# Altium PCB power_button_module.PcbDoc
Units mm, origin at the board's own origin, x right, y up, seen from the top; angles counter-clockwise.
Board outline 11.43 x 14.4 mm, 2 copper layers (Top Layer, Bottom Layer); 13 components, 9 nets, 42 pads, 0 vias.
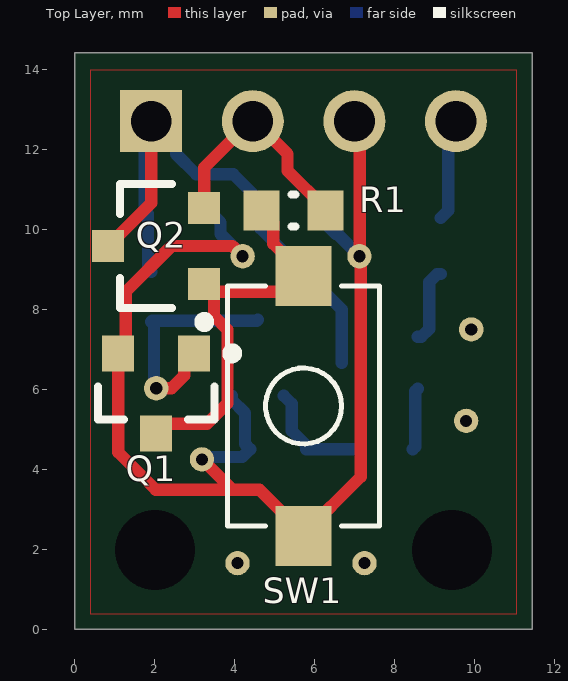
[diagram p0: Top Layer view]
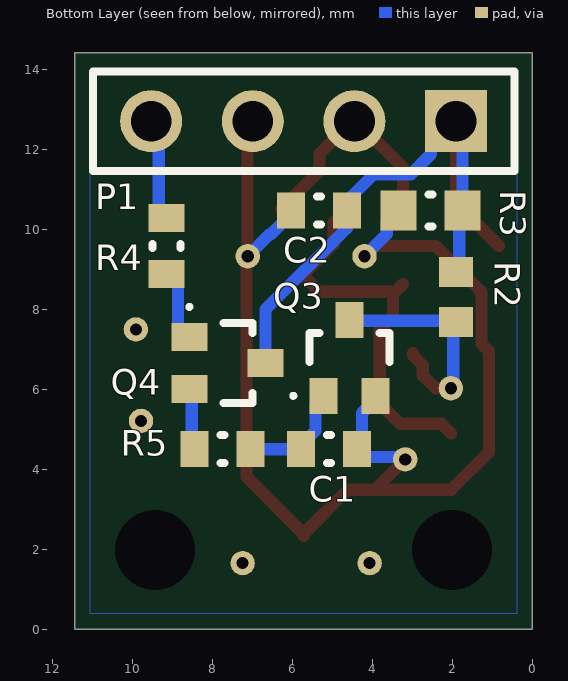
[diagram p1: Bottom Layer view, seen from below]

## Layer stack, top to bottom
Top Solder: solder mask 0.0102, Solder Resist, Dk 3.5
Top Layer: signal copper 0.0356
Dielectric 1: dielectric 0.32, FR-4, Dk 4.8
Bottom Layer: signal copper 0.0356
Bottom Solder: solder mask 0.0102, Solder Resist, Dk 3.5

## Board outline
0,0 11.43,0 11.43,14.405 0,14.405

## Design rules (kind name [scope] priority, off if disabled: settings)
Clearance [All] p1: gap=0.254 ignorepadtopadclearanceinfootprint=FALSE except(0: Arc-Hole Track-Hole SMDPad-Hole THPad-Hole Via-Hole Fill-Hole Poly-Hole Region-Hole Text-Hole)
PolygonConnect [All] p1: connectstyle=Relief reliefconductorwidth=0.254 reliefentries=4 polygonreliefangle="90 Angle" airgapwidth=0.254
RoomDefinition Latch [InComponentClass('Latch')] p1: confinementstyle=ConfineOut formatcopy=TRUE lockcomponents=FALSE outline 16.064,-12.011 68.007,-12.011 68.007,1.959 16.064,1.959
RoutingVias [All] p1: holewidth=0.711 width=1.27 viastyle="Through Hole" minholewidth=0.711 minwidth=1.27 maxholewidth=0.711 maxwidth=1.27
SolderMaskExpansion [All] p1: expansion=0.102
Width [All] p1: maxlimit=0.305 minlimit=0.254 preferedwidth=0.254 minimp=50.000000 maximp=50.000000 favimp=50.000000
30 further rules are at their usual default settings.

## Components (designator, comment, footprint, x,y, rotation, side; value= is the part's Value field where it differs from the comment)
C1 "CAP 100nF 6.3V 0603(1608)" CAPC0603(1608)100_L 5.08,4.499 r0 bottom value=100nF
C2 "CAP 100nF 6.3V 0603(1608)" CAPC0603(1608)100_L 5.334,10.468 r180 bottom value=100nF
P1 "HMTSW-104-23-G-S-237" SMTC-HMTSW-104-23-X-S-237 1.905,12.7 r0 bottom
Q1 "N-Chan" ONSC-SOT-23-3-318-08_V 2.032,5.896 r270 top
Q2 "P-Chan" AO-SOT-23-3L_V 2.032,9.579 r180 top
Q3 "NPN" ONSC-SC-70-3-419-04_V 4.572,6.785 r90 bottom
Q4 "PNP" ONSC-SC-70-3-419-04_V 7.62,6.658 r180 bottom
R1 "100K" RESC0603(1608)_N 5.461,10.468 r0 top value="100000.00 Ohm"
R2 "10k" RESC1609X55X30LL10T20 1.905,8.309 r270 bottom
R3 "100K" RESC0603(1608)_N 2.54,10.468 r180 bottom value="100000.00 Ohm"
R4 "1K" RESC0603(1608)_L 9.144,9.579 r270 bottom value="1000.00 Ohm"
R5 "1K" RESC0603(1608)_L 7.747,4.499 r180 bottom value="1000.00 Ohm"
SW1 "434121025816" 434121025816 5.715,5.58 r90 top

## Footprints (in the part's own frame and the unit in brackets; to place one, negate y for a bottom-side part, rotate by r counter-clockwise, add the part's x,y. Pads: shape width x height; smd on the part's side, far side on the other; paste and mask are expansions set on the pad)
434121025816 [mm] "6.0*3.8mm vertical type, SMD, height 2.5mm, black actuator, 160gf, T&R"
  rect 1.5x1.4 smd: 1(-3.25,0) 2(3.25,0)
  silkscreen extent -3,-1.9 3,1.9, body extent -3.65,-1.95 3.65,1.95, height 2.5
AO-SOT-23-3L_V [mm] "SOT23, 3-Leads, Body 3.1x1.8mm, Pitch 0.95mm"
  rect 0.8x0.8 smd: 1(-1.2,0.95) 2(-1.2,-0.95) 3(1.2,0)
  silkscreen extent -1.33,-1.55 0.9,2.02, body extent -1.5,-1.55 1.5,1.55, height 1.25
CAPC0603(1608)100_L [mm] "Chip Capacitor, Body 1.6x0.8mm, Height 1.0mm, IPC High Density"
  rect 0.7x0.9 smd: 1(-0.7,0) 2(0.7,0)
  silkscreen extent -0.05,-0.35 0.05,0.35, body extent -0.87,-0.47 0.88,0.48, height 1
ONSC-SC-70-3-419-04_V [mm] "SOT23, 3-Leads, Body 2x1.25mm, Pitch 0.65mm"
  rect 0.9x0.7 smd: 1(-0.95,0.65) 2(-0.95,-0.65) 3(0.95,0)
  silkscreen extent -1,-1 0.63,1.45, body extent -0.63,-1 0.63,1, height 1
ONSC-SOT-23-3-318-08_V [mm] "SOT23, 3-Leads, Body 2.92x1.3mm, Pitch 0.95mm"
  rect 0.9x0.8 smd: 1(-1,0.95) 2(-1,-0.95) 3(1,0)
  silkscreen extent -1.12,-1.46 0.65,2.03, body extent -0.65,-1.46 0.65,1.46, height 1.11
RESC0603(1608)_L [mm] "Chip Resistor, Body 1.6x0.8mm, IPC High Density"
  rect 0.7x0.9 smd: 1(-0.7,0) 2(0.7,0)
  silkscreen extent -0.05,-0.35 0.05,0.35, body extent -0.85,-0.47 0.85,0.47, height 0.6
RESC0603(1608)_N [mm] "Chip Resistor, Body 1.6x0.8mm, IPC Medium Density"
  rect 0.9x1 smd: 1(-0.8,0) 2(0.8,0)
  silkscreen extent -0.05,-0.4 0.05,0.4, body extent -0.85,-0.47 0.85,0.47, height 0.6
RESC1609X55X30LL10T20 [mm]
  rect 0.75x0.85 smd: 1(-0.625,0) 2(0.625,0)
  body extent -0.85,-0.48 0.85,0.48, height 0.55
SMTC-HMTSW-104-23-X-S-237 [mm] "Terminal Strip, 1x2 Pins, Vertical, 2.54mm Pitch, Male"
  rect 1.55x1.55 hole 1.02: 1(0,0)
  round 1.55 hole 1.02: 2(2.54,0) 3(5.08,0) 4(7.62,0)
  silkscreen extent -1.46,-1.24 9.08,1.24, body extent -1.27,-1.27 8.89,1.27, height 8.56

## Part data
C1 C2: library part CMP-1035-02577-1, "CAP 100nF 6.3V ±20% 0603 (1608 Metric) Thickness 1mm SMD", Case-EIA=0603, Case-Metric=1608, Rated Voltage="6.3 V", Tolerance=±20%, Max Thickness="1 mm", Technology=SMT
P1: library part CMP-1024-00023-1, "Modified .025\" SQ Post Header, Through-hole, Vertical, -55 to 125 degC, 2.54 mm Pitch, 4-Pin, Male, RoHS", Manufacturer=Samtec, Temperature Range="-55 to 125 degC", ComponentLink1Description="Manufacturer URL", ComponentLink1URL=http://www.samtec.com, ComponentLink2Description=Datasheet, ComponentLink2URL=http://www.samtec.com/documents/webfiles/pdf/HMTSW.PDF, ComponentLink3Description="Package Specification", ComponentLink3URL=http://www.samtec.com/documents/webfiles/cpdf/HMTSW-XXX-XX-X-X-XXXX-XX-XX-MKT1.pdf, DatasheetVersion=F-214, Mounting Technology=Through-hole, Orientation=Vertical, PackageDescription="Assembly .025 [.64] SQ. Post Hi-Temp Terminal Strip", PackageReference=HMTSW-104-23-X-S-237, PackageVersion="AL, 3/1987", PartNumber=HMTSW-104-23-G-S-237, Pitch="2.54 mm", RoHS=True
Q1: library part CMP-1058-00775-1, "MGSF2N02ELT1G Power MOSFET, 2.8 A, 20 V, N-Channel, 3-Pin SOT-23, Pb-Free, Tape and Reel", Manufacturer="On Semiconductor", Package Type=SOT-23-3, PartNumber=MGSF2N02ELT1G, Channel Polarity="N Channel", Ciss Typ (pF)=150, ComponentLink1Description="Manufacturer URL", ComponentLink1URL=http://www.onsemi.com/, ComponentLink2Description=Datasheet, ComponentLink2URL=http://www.onsemi.cn/pub_link/Collateral/MGSF2N02EL-D.PDF, ComponentLink3Description="Package Specification", ComponentLink3URL=http://www.onsemi.cn/pub_link/Collateral/318-08.PDF, Configuration=Single, Coss Typ (pF)=130, Crss Typ (pF)=45, DatasheetVersion="Rev. 3", ID Max (A)=2.8, Mounting Technology="Surface Mount", PackageDescription="3-Pin Small Outline Transistor, Body 2.92 x 1.3 mm, Pitch 0.95 mm", PackageReference=SOT-23-3-318-08, PackageVersion="Rev. AP, 11/2009", Packing="Tape and Reel", PD Max (W)=1.25, Qrr Typ (nC)=200, RoHS=Pb-Free, V(BR)DSS Min (V)=20, VGS(th) Max (V)=1, VGS Max (V)=8
Q2: library part CMP-2000-05778-1, "AO3401A P-Channel MOSFET, 30 V, 4 A, -55 to 150 degC, 3-Pin SOT-23-3L, RoHS, Tape and Reel", Continuous Drain Current=4A, Drain-Source On-Volt=30V, Frequency (Max)=NotRequiredMHz, Gate-Source Voltage (Max)=?12V, Manufacturer="Alpha and Omega", Operating Temperature Classification=Military, Operating Temp Range=-55Cto150C, Output Power (Max)=NotRequiredW, Package Description="3-Pin Small Outline Transistor, Body 2.95 x 1.6 mm, Pitch 0.95 mm", Package Reference=SOT-23-3L, Package Type=SOT-23, Power Dissipation=1.4W, Power Gain=NotRequireddB, Channel Mode=Enhancement, Datasheet URL=http://www.aosmd.com/res/data_sheets/AO3401A.pdf, Datasheet Version="Rev. 3, 03/2011", Drain-Source On-Res=0.044ohm, Drain Current (Max)=4A, Drain Efficiency=NotRequired%, Manufacturer URL=http://www.aosmd.com/, Mounting=SurfaceMount, Mounting Technology=SurfaceMount, Noise Figure=NotRequireddB, Number of  Elements=1, Package URL=http://www.aosmd.com/res/packaging_information/SOT-23-3L.pdf, Pin Count=3, Polarity=P, Rad Hardened=No, Type=PowerMOSFET
Q3: library part CMP-1048-00379-1, "SMMBT2222AWT1GGeneral Purpose Transistor, NPN Silicon, 3-Pin SC70, Pb-Free, Tape and Reel", Manufacturer="On Semiconductor", PartNumber=SMMBT2222AWT1G, ComponentLink1Description="Manufacturer URL", ComponentLink1URL=http://www.onsemi.com/, ComponentLink2Description=Datasheet, ComponentLink2URL=http://www.onsemi.cn/pub_link/Collateral/MMBT2222AWT1-D.PDF, ComponentLink3Description="Package Specification", ComponentLink3URL=http://www.onsemi.cn/pub_link/Collateral/419-04.PDF, DatasheetVersion="Rev. 6", fT Min (MHz)=300, IC Continuous (A)=0.6, Mounting Technology="Surface Mount", PackageDescription="3-Pin Small Outline Transistor, Body 2 x 1.25 mm, Pitch 0.65 mm", PackageReference=SC-70-3-419-04, PackageVersion="Rev. N, 11/2008", Packing="Tape and Reel", Polarity=NPN, RoHS=TRUE
Q4: library part CMP-1048-00366-1, "MMBT3906WT1 General Purpose Transistor, PNP Silicon, 3-Pin SC70, Tape and Reel", Manufacturer="On Semiconductor", PartNumber=MMBT3906WT1, ComponentLink1Description="Manufacturer URL", ComponentLink1URL=http://www.onsemi.com/, ComponentLink2Description=Datasheet, ComponentLink2URL=http://www.onsemi.cn/pub_link/Collateral/MMBT3904WT1-D.PDF, ComponentLink3Description="Package Specification", ComponentLink3URL=http://www.onsemi.cn/pub_link/Collateral/419-04.PDF, DatasheetVersion="Rev. 8", fT Min (MHz)=250, IC Continuous (A)=-0.2, Mounting Technology="Surface Mount", PackageDescription="3-Pin Small Outline Transistor, Body 2 x 1.25 mm, Pitch 0.65 mm", PackageReference=SC-70-3-419-04, PackageVersion="Rev. N, 11/2008", Packing="Tape and Reel", Polarity=PNP, RoHS=FALSE
R1 R3: library part CMP-1012-00736-1, "100K 0.1W 1% 0603 (1608 Metric)  SMD", Case-EIA=0603, Case-Metric=1608, Power="0.1 W", Tolerance="1 %", Technology=SMT
R2: library part CMP-1666-00005-1, "10kO 1%CRCW060310K0FKEA", PartNumber=CRCW060310K0FKEA, ComponentLink1Description=Datasheet, ComponentLink1URL=http://www.vishay.com/docs/20043/crcwhpe3.pdf, PackageReference=0603
R4 R5: library part CMP-1012-00074-1, "1K 0.1W 5% 0603 (1608 Metric)  SMD", Case-EIA=0603, Case-Metric=1608, Power="0.1 W", Tolerance="5 %", Technology=SMT
SW1: library part CMP-1459-00004-1, "WS-TASV SMD Tact Switch 6.0X3.8 mm", Manufacturer="Wuerth Elektronik", ComponentLink1Description="Manufacturer URL", ComponentLink1URL=http://www.we-online.com, ComponentLink2Description=Datasheet, ComponentLink2URL=http://katalog.we-online.de/em/datasheet/434121025816.pdf, NoPins=02, PackageReference=434121025816, PartNumber=434121025816

## Free pads (board coordinates)
  round 0 hole 2: 2(2,1.984) 2(9.43,1.984)
  round 0.61 hole 0.305: 3(2.032,6.023) 3(3.175,4.245) 3(4.064,1.651) 3(4.191,9.325) 3(7.112,9.325) 3(7.239,1.651) 3(9.779,5.207) 3(9.906,7.493)

## Nets (pads, with @x,y where several pads share a name; then routed paths per layer and width w, separated by ;. In a path a pad name is that pad's centre, name@x,y a point inside that pad or via, vN(x,y) a via of type N, cw(c..) or ccw(c..) an arc to the next point about the centre after c; other vN are vias at no path point)
GND: C1.1 C2.1 P1.3 pad.3@3.175,4.245 pad.3@4.064,1.651 pad.3@4.191,9.325 pad.3@7.112,9.325 pad.3@7.239,1.651 pad.3@9.779,5.207 pad.3@9.906,7.493 Q1.2 Q3.2 R3.1 SW1.1 | length 31.2
  Top Layer w0.305: pad.3@3.175,4.245 3.937,3.483 ; pad.3@4.191,9.325 3.937,9.579 2.413,9.579 1.27,8.436 1.27,7.134 1.082,6.946 Q1.2 1.082,4.421 2.02,3.483 3.937,3.483 ; SW1.1 SW1.1@5.715,2.38 ; P1.3@6.985,12.754 7.117,12.622 7.117,9.33 7.112,9.325 7.144,9.293 7.144,3.809 SW1.1@5.715,2.38 ; 3.937,3.483 4.612,3.483 SW1.1@5.715,2.38
  Bottom Layer w0.305: pad.3@3.175,4.245 3.233,4.303 4.184,4.303 C1.1 4.251,4.628 4.251,5.406 3.922,5.735 Q3.2 ; R3.1 3.638,10.17 3.638,9.878 pad.3@4.191,9.325 ; C2.1 6.034,10.368 6.538,9.864 6.573,9.864 pad.3@7.112,9.325
Logic_IO: P1.4 R4.1 | length 2.6
  Bottom Layer w0.305: R4.1 9.334,10.469 9.334,12.563 P1.4@9.525,12.754
NetC1_2: C1.2 Q3.1 R5.2 | length 2.8
  Bottom Layer w0.305: Q3.1 5.42,5.637 5.42,4.959 5.78,4.599 C1.2 R5.2
NetQ1_1: pad.3@2.032,6.023 Q1.1 Q3.3 R2.2 | length 5.9
  Top Layer w0.305: pad.3@2.032,6.023 2.413,6.023 2.734,6.344 2.734,6.598 2.982,6.846 Q1.1
  Bottom Layer w0.305: pad.3@2.032,6.023 1.974,6.081 1.974,7.615 R2.2 1.93,7.709 4.547,7.709 Q3.3
NetQ1_3: Q1.3 Q2.1 R1.1 SW1.2 | length 9.8
  Top Layer w0.305: Q1.3 2.27,5.134 3.302,5.134 3.81,5.642 3.81,7.493 3.48,7.823 3.48,8.381 Q2.1@3.425,8.436 ; Q2.1 Q2.1@3.425,8.436 ; R1.1 4.959,10.17 4.959,9.636 5.715,8.88 SW1.2 5.321,8.436 Q2.1@3.425,8.436
NetQ4_1: Q4.1 R4.2 | length 1.9
  Bottom Layer w0.305: Q4.1 8.659,7.308 8.857,7.506 8.857,8.681 9.055,8.879 R4.2
NetQ4_2: Q4.2 R5.1 | length 1.6
  Bottom Layer w0.305: R5.1 8.508,4.561 8.508,5.946 Q4.2
Vin: P1.2 Q2.2 R1.2 | length 5.8
  Top Layer w0.305: Q2.2 3.232,11.541 4.445,12.754 5.316,11.883 5.316,11.463 6.261,10.518 R1.2
Vout: C2.2 P1.1 Q2.3 Q4.3 R2.1 R3.2 | length 16.2
  Top Layer w0.305: Q2.3 1.905,10.652 P1.1@1.905,12.754
  Bottom Layer w0.305: R2.1 1.823,9.016 1.823,10.385 R3.2 1.74,12.589 1.905,12.754 2.528,12.131 2.528,11.877 3.031,11.374 3.958,11.374 4.634,10.699 C2.2 4.634,10.025 6.67,7.989 Q4.3

## Polygon pours and split planes (outlines as drawn)
GND on Top Layer "Top Layer-GND" (solid, shelved, pour order 1): 0.381,0.381 11.049,0.381 11.049,13.97 0.381,13.97
GND on Bottom Layer "Bottom Layer-GND" (solid, shelved, pour order 2): 0.381,0.381 11.049,0.381 11.049,13.97 0.381,13.97